# EAGLE board base_panelized (EAGLE 9.5.1), part 1 of 4
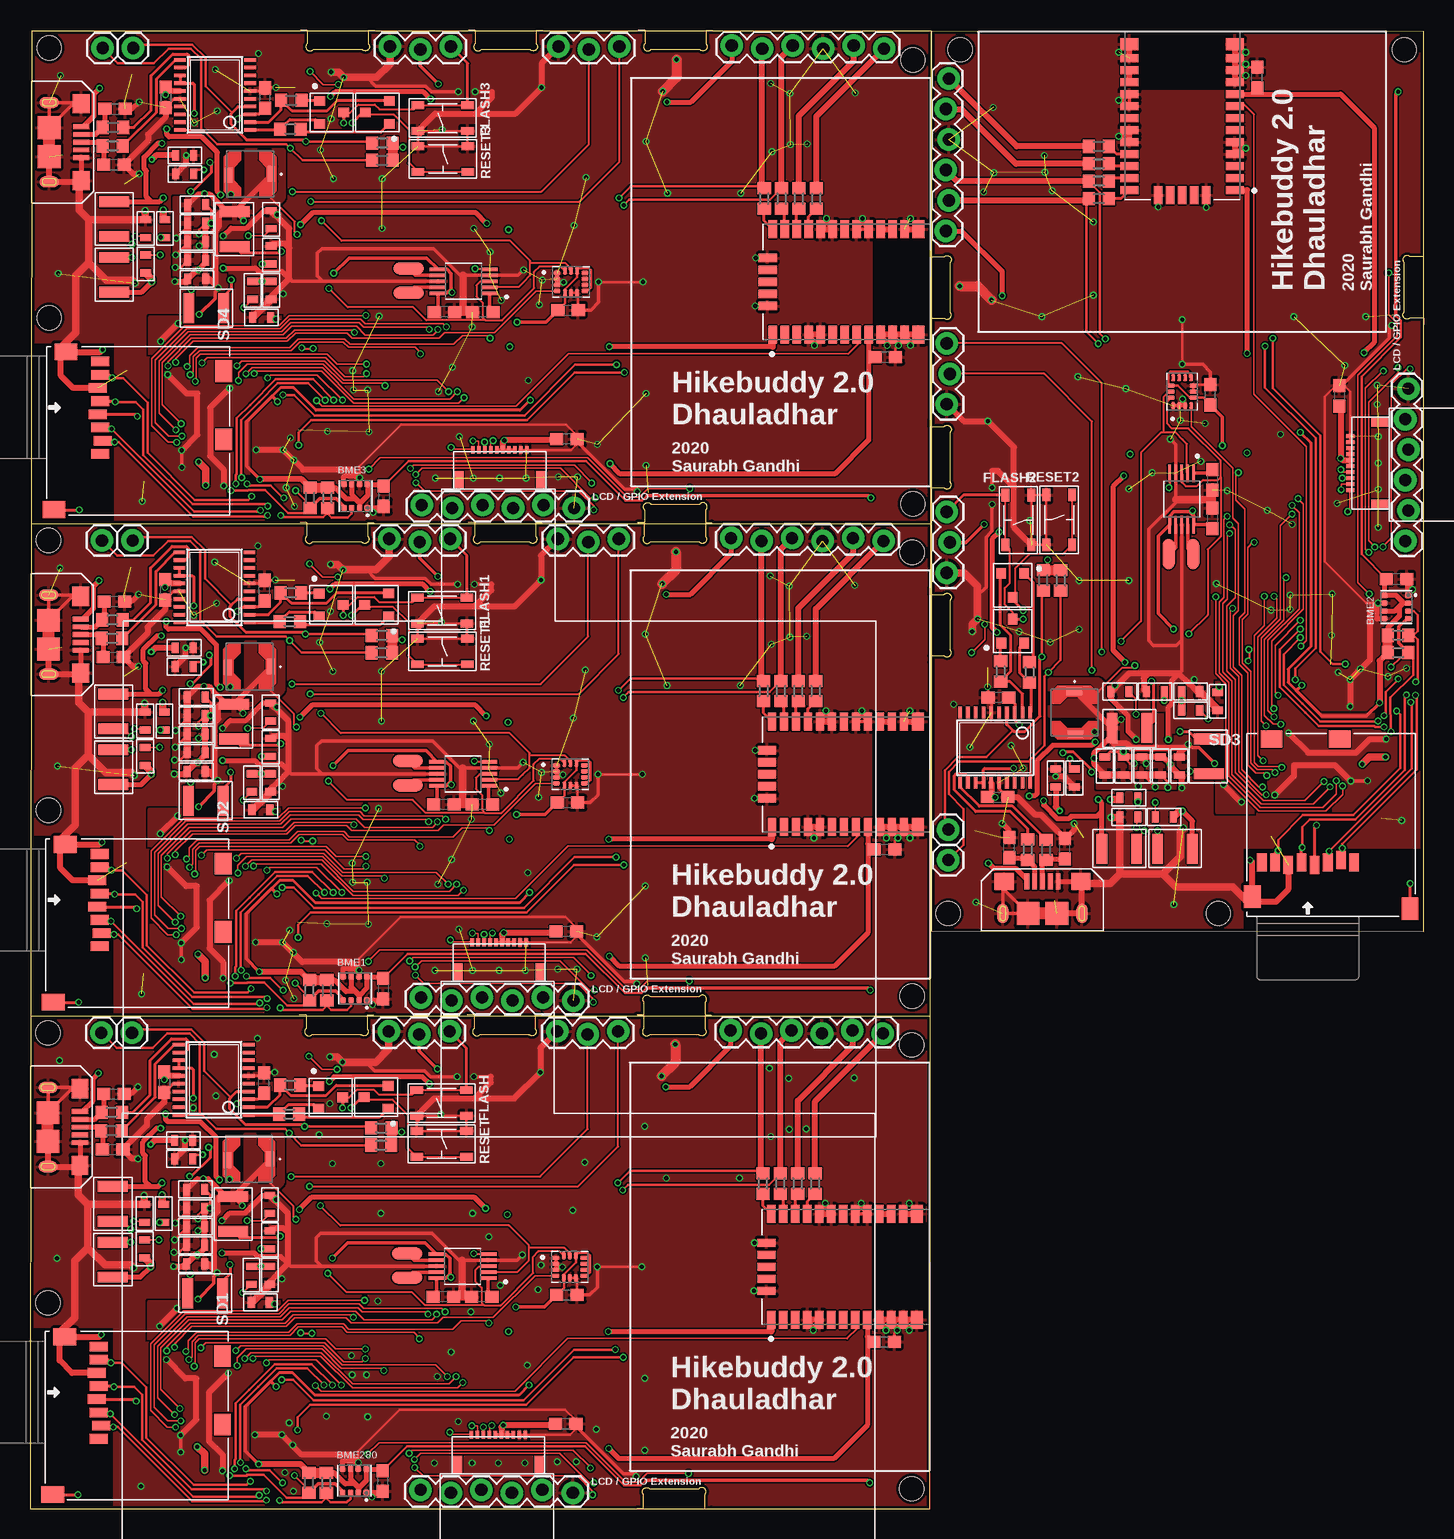
[diagram p0: board, top side]
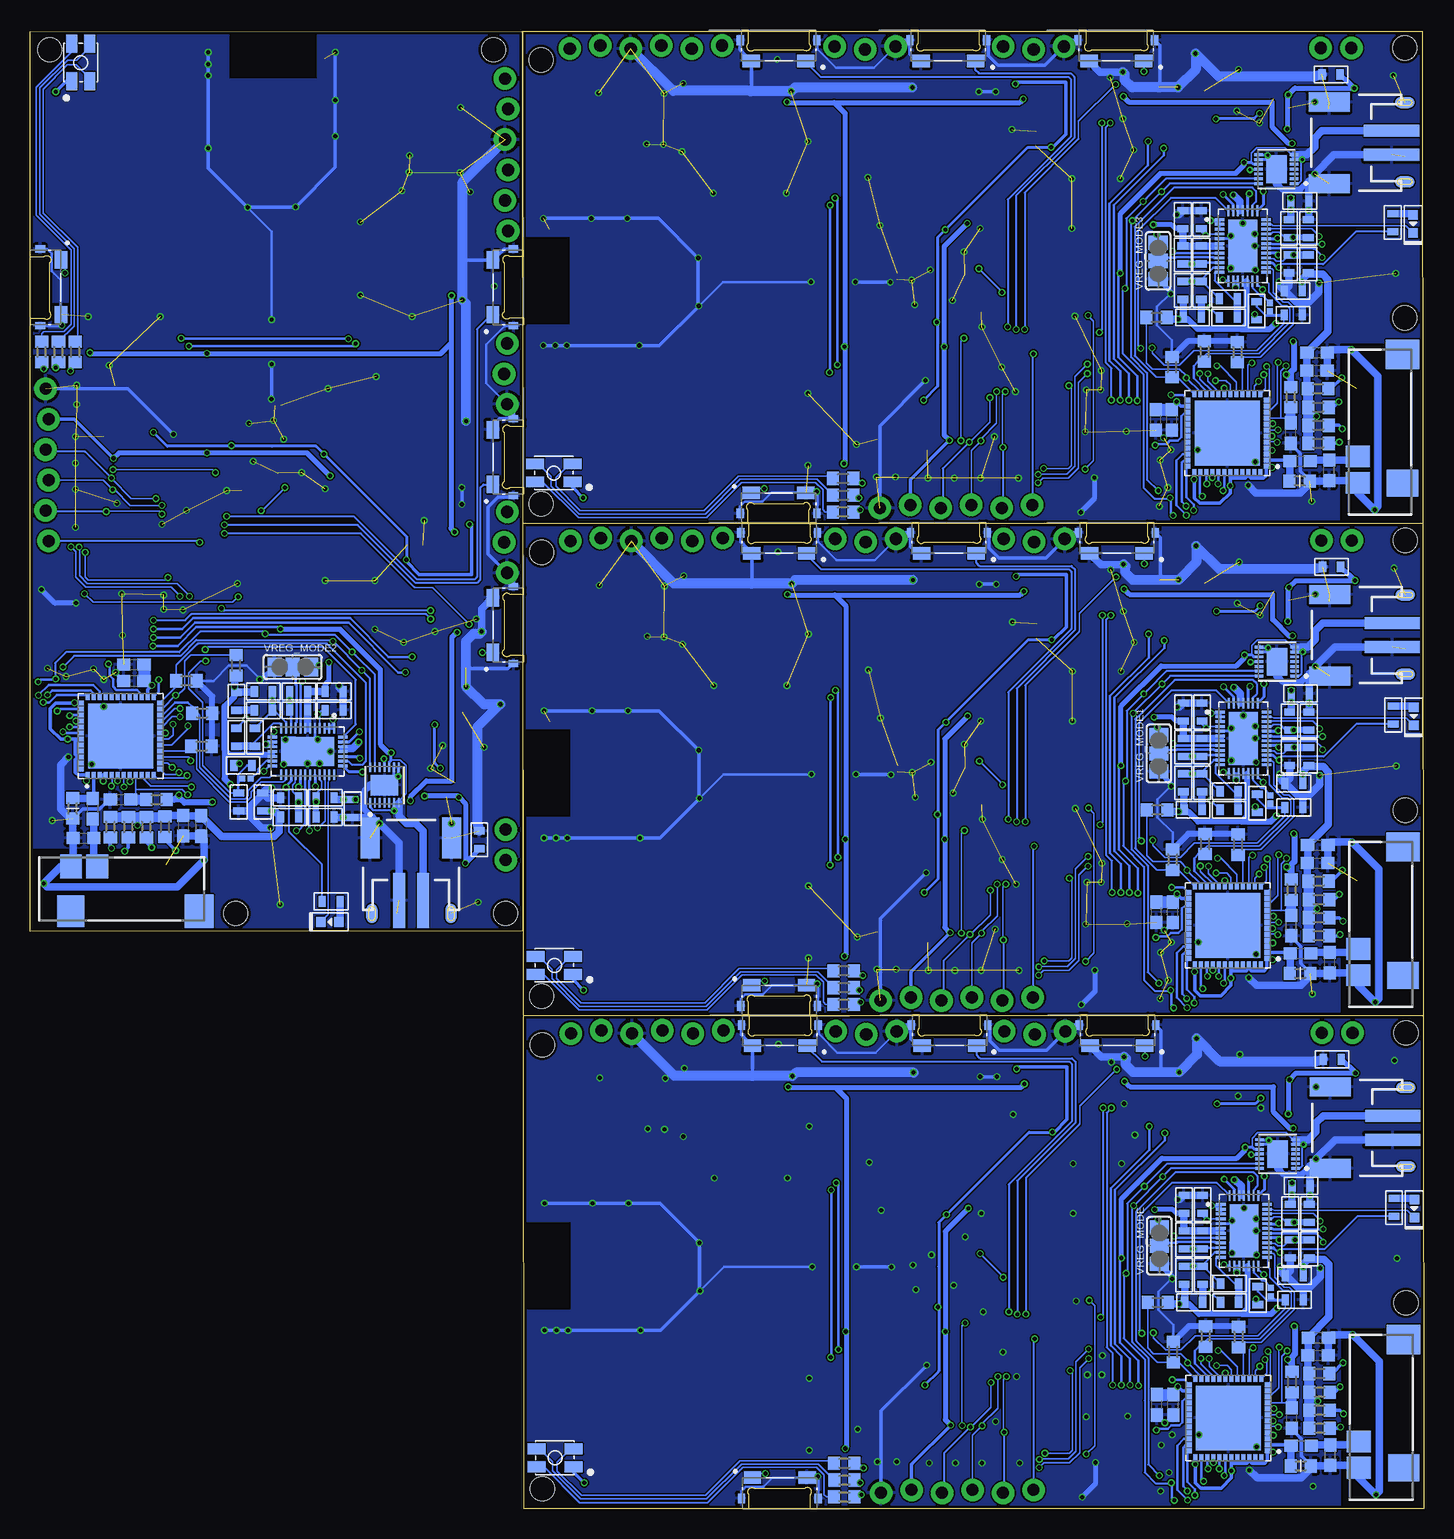
[diagram p1: board, bottom side, seen from below]

Size 116.2 x 123.25 mm. Coordinates in mm from the lower left corner, seen from the top.
Outline: 75.05,41.05 75,0 0,0 0.05,41.05
Outline: 0.05,41.05 75.05,41.05
Outline: 75.05,41.05 75.1,82.1
Outline: 0.1,82.1 0.05,41.05
Outline: 75.15,123.15 116.2,123.1 116.2,48.1 75.15,48.15 75.15,123.15
Outline: 0.1,82.1 75.1,82.1
Outline: 75.1,82.1 75.15,123.15
Outline: 75.15,123.15 0.15,123.15 0.1,82.1
Copper layers (1*16): Top 0.035mm / dielectric 1.5mm / Bottom 0.035mm
Design rules "MF_4_mil_drill_2_Layer": minimum track width 5mil, minimum drill 4mil, track to track 5mil, track to pad 5mil, pad to pad 5mil, via to via 5mil, smd to smd 0mil, copper to edge 10mil, drill to drill 10mil, minimum pad ring 4mil, minimum via ring 4mil, stop-mask expansion 2mil, vias tented up to drill 25mil, thermal gap 10mil
Holes 2 mm at 73.5,38.65 73.5,1.65 1.5,39.65 1.5,17.15 73.55,79.7 73.55,42.7 1.55,80.7 1.55,58.2 77.55,121.6 114.55,121.6 76.55,49.6 99.05,49.6 73.6,120.75 73.6,83.75 1.6,121.75 1.6,99.25
tKeepout: area 71,18.1 to 75,22.1; area 71,59.2 to 75,63.2; area 94,119.1 to 98,123.1; area 71.1,100.2 to 75.1,104.2
bKeepout: area 71,18.1 to 75,22.1; area 71,59.2 to 75,63.2; area 94,119.1 to 98,123.1; area 71.1,100.2 to 75.1,104.2

## Footprints (pad centres in the part's own frame; a part is rotated, then mirrored left to right if it is on the bottom)
PRO-OB-440_1 = smd 2 x 1.8: 1 1.865,-2.65; 2 1.865,-4.85 | smd 2.6 x 2.25: 3 -1.865,-2.65 | smd 2.8 x 2.45: 4 -1.865,-13.35
JST-2-SMD = smd 1 x 4.6: 1 -1,-3.7; 2 1,-3.7 | smd 1.6 x 3.4: NC1 -3.4,1.5; NC2 3.4,1.5
PSON65P250X250X100-8N = smd 0.49 x 0.45: 1 0.97,0.975; 2 0.97,0.325; 3 0.97,-0.325; 4 0.97,-0.975; 5 -0.97,-0.975; 6 -0.97,-0.325; 7 -0.97,0.325; 8 -0.97,0.975
C0603 = smd 1.1 x 1: 1 -0.85,0; 2 0.85,0
C0603' = smd 0.6 x 0.9: P$1 -0.75,0; P$2 0.75,0
LED0603 = smd 0.8 x 0.8: ANODE 0.75,0; CATHODE -0.75,0
PLCC4 = smd 1.5 x 0.9: P$1 -1.55,0.75; P$2 -1.55,-0.75; P$3 1.55,-0.75; P$4 1.55,0.75
PQFN50P700X700X104-49N = smd 0.45 x 0.35: 1 -3.265,2.75; 2 -3.265,2.25; 3 -3.265,1.75; 4 -3.265,1.25; 5 -3.265,0.75; 6 -3.265,0.25; 7 -3.265,-0.25; 8 -3.265,-0.75; 9 -3.265,-1.25; 10 -3.265,-1.75; 11 -3.265,-2.25; 12 -3.265,-2.75; 25 3.265,-2.75; 26 3.265,-2.25; 27 3.265,-1.75; 28 3.265,-1.25; 29 3.265,-0.75; 30 3.265,-0.25; 31 3.265,0.25; 32 3.265,0.75; 33 3.265,1.25; 34 3.265,1.75; 35 3.265,2.25; 36 3.265,2.75 | smd 0.35 x 0.45: 13 -2.75,-3.265; 14 -2.25,-3.265; 15 -1.75,-3.265; 16 -1.25,-3.265; 17 -0.75,-3.265; 18 -0.25,-3.265; 19 0.25,-3.265; 20 0.75,-3.265; 21 1.25,-3.265; 22 1.75,-3.265; 23 2.25,-3.265; 24 2.75,-3.265; 37 2.75,3.265; 38 2.25,3.265; 39 1.75,3.265; 40 1.25,3.265; 41 0.75,3.265; 42 0.25,3.265; 43 -0.25,3.265; 44 -0.75,3.265; 45 -1.25,3.265; 46 -1.75,3.265; 47 -2.25,3.265; 48 -2.75,3.265 | smd 5.4 x 5.4: 49 0,0
TACT4.2MM = smd 1.05 x 0.65: P$1 -2.075,1.075; P$2 2.075,1.075; P$3 -2.075,-1.075; P$4 2.075,-1.075
TSSOP20 = smd 0.305 x 0.991: 1 -2.925,-2.918; 2 -2.275,-2.918; 3 -1.625,-2.918; 4 -0.975,-2.918; 5 -0.325,-2.918; 6 0.325,-2.918; 7 0.975,-2.918; 8 1.625,-2.918; 9 2.275,-2.918; 10 2.925,-2.918; 11 2.925,2.918; 12 2.275,2.918; 13 1.625,2.918; 14 0.975,2.918; 15 0.325,2.918; 16 -0.325,2.918; 17 -0.975,2.918; 18 -1.625,2.918; 19 -2.275,2.918; 20 -2.925,2.918
MICROUSB-RIGHT = smd 0.4 x 1.35: 1 -1.3,1.27; 2 -0.65,1.27; 3 0,1.27; 4 0.65,1.27; 5 1.3,1.27 | smd 0.9 x 1.6: S1 -3.3,-1.4; S2 3.3,-1.4 | smd 1.6 x 1.4: S3 -3.2,1.27; S4 3.2,1.27 | smd 1.9 x 1.9: S5 -1.2,-1.405; S6 1.2,-1.405 | smd 0.9 x 1.6 bottom: S7 -3.3,-1.4; S8 3.3,-1.4
1X06_LOCK = drill 1.016 pad 1.88: 1 0,0; 2 2.54,-0.254; 3 5.08,0; 4 7.62,-0.254; 5 10.16,0; 6 12.7,-0.254
1X03_LOCK = drill 1.016 pad 1.88: 1 0,0.127; 2 2.54,-0.127; 3 5.08,0.127
SOLDER_PAD_2 = smd 1.016 x 2.54: P$1 -1.016,0; P$2 1.016,0
1X01 = drill 1.016 pad 1.88: 1 0,0
L0603 = smd 1 x 1.1: 1 -0.85,0; 2 0.85,0
INDP_LPS4018-472MRB = smd 0.635 x 1.27: 1 -1.77,0; 2 1.81,0.1
L1210 = smd 0.9 x 2.5: P$1 -1.45,0; P$2 1.45,0
R0603 = smd 1 x 1.1: 1 -0.85,0; 2 0.85,0
R0603' = smd 0.6 x 0.9: P$1 -0.75,0; P$2 0.75,0
SW_EVQ-P4HB3B = smd 1.45 x 1.05: 1 -2.275,0.875; 2 2.275,0.875 | smd 0.6 x 0.8: 3 -3.2,-0.85; 4 3.2,-0.85
MF-MICROSD = smd 1.4 x 1.9: G0 -6.589,7.001; G1 6.561,6.001 | smd 0.8 x 1.5: PIN1 -1.939,3.151; PIN2 -0.839,2.951; PIN3 0.261,3.151; PIN4 1.361,3.351; PIN5 2.461,3.151; PIN6 3.561,3.351; PIN7 4.661,3.151; PIN8 5.761,3.151 | smd 1.8 x 1.4: PIN9 4.961,-7.149; PIN10 -0.739,-7.149
PAD.02X.02 = smd 0.508 x 0.508: P$1 0,0
QFN40P600X400X80-39N = smd 0.86 x 0.22: 1 -1.935,2.2; 2 -1.935,1.8; 3 -1.935,1.4; 4 -1.935,1; 5 -1.935,0.6; 6 -1.935,0.2; 7 -1.935,-0.2; 8 -1.935,-0.6; 9 -1.935,-1; 10 -1.935,-1.4; 11 -1.935,-1.8; 12 -1.935,-2.2; 20 1.935,-2.2; 21 1.935,-1.8; 22 1.935,-1.4; 23 1.935,-1; 24 1.935,-0.6; 25 1.935,-0.2; 26 1.935,0.2; 27 1.935,0.6; 28 1.935,1; 29 1.935,1.4; 30 1.935,1.8; 31 1.935,2.2 | smd 0.22 x 0.86: 13 -1.2,-2.935; 14 -0.8,-2.935; 15 -0.4,-2.935; 16 0,-2.935; 17 0.4,-2.935; 18 0.8,-2.935; 19 1.2,-2.935; 32 1.2,2.935; 33 0.8,2.935; 34 0.4,2.935; 35 0,2.935; 36 -0.4,2.935; 37 -0.8,2.935; 38 -1.2,2.935 | smd 2.4 x 4.4: 39 0,0
SON40P300X300X80-15N = smd 0.76 x 0.22: 1 -1.485,1.2; 2 -1.485,0.8; 3 -1.485,0.4; 4 -1.485,0; 5 -1.485,-0.4; 6 -1.485,-0.8; 7 -1.485,-1.2; 8 1.485,-1.2; 9 1.485,-0.8; 10 1.485,-0.4; 11 1.485,0; 12 1.485,0.4; 13 1.485,0.8; 14 1.485,1.2 | smd 1.7 x 2.3: 15 0,0
SOT-23-3 = smd 0.9 x 0.8: P$1 -1,0.95; P$2 -1,-0.95; P$3 1,0
SOP50P490X110-10N = smd 1.44 x 0.3: 1 -2.145,1; 2 -2.145,0.5; 3 -2.145,0; 4 -2.145,-0.5; 5 -2.145,-1; 6 2.145,-1; 7 2.145,-0.5; 8 2.145,0; 9 2.145,0.5; 10 2.145,1
PQFN50P250X300X100-14N = smd 0.58 x 0.35: 1 -1.16,0.75; 2 -1.16,0.25; 3 -1.16,-0.25; 4 -1.16,-0.75; 8 1.16,-0.75; 9 1.16,-0.25; 10 1.16,0.25; 11 1.16,0.75 | smd 0.35 x 0.58: 5 -0.5,-0.91; 6 0,-0.91; 7 0.5,-0.91; 12 0.5,0.91; 13 0,0.91; 14 -0.5,0.91
FH12-10S-0.5SH = smd 0.3 x 0.655: DISP -0.25,5.25; EXTCOMIN -0.75,5.25; EXTMODE 1.25,5.25; SCLK -2.25,5.25; SCS -1.25,5.25; SI -1.75,5.25; VDD 0.75,5.25; VDDA 0.25,5.25; VSS 1.75,5.25; VSSA 2.25,5.25 | smd 0.85 x 1.5: P$1 -3.45,2.75; P$2 3.45,2.75
LCC100P960X1400X210-31N = smd 1.5 x 0.7: 1 4.4,-6.2; 2 4.4,-5.2; 3 4.4,-4.2; 4 4.4,-3.2; 5 4.4,-2.2; 6 4.4,-1.2; 7 4.4,-0.2; 8 4.4,0.8; 9 4.4,1.8; 10 4.4,2.8; 11 4.4,3.8; 12 4.4,4.8; 15 -4.4,4.8; 16 -4.4,3.8; 17 -4.4,2.8; 18 -4.4,1.8; 19 -4.4,0.8; 20 -4.4,-0.2; 21 -4.4,-1.2; 22 -4.4,-2.2; 23 -4.4,-3.2; 24 -4.4,-4.2; 25 -4.4,-5.2; 26 -4.4,-6.2 | smd 1.5 x 1: 13 4.4,5.95; 14 -4.4,5.95 | smd 0.7 x 1.5: 27 -2,-6.6; 28 -1,-6.6; 29 0,-6.6; 30 1,-6.6; 31 2,-6.6
SJ_2 = smd 1.168 x 1.6: 1 -1.524,0; 2 0,0; 3 1.524,0

## Placement (x,y rotation side)
ANT  PRO-OB-440  [PRO-OB-440_1]  3.55,0.75 180 bottom
ANT1  PRO-OB-440  [PRO-OB-440_1]  3.6,41.8 180 bottom
ANT2  PRO-OB-440  [PRO-OB-440_1]  115.45,51.65 90 bottom
ANT3  PRO-OB-440  [PRO-OB-440_1]  3.65,82.85 180 bottom
BATTERY1  S2B-PH-SM4-TB(LF)(SN)  [JST-2-SMD]  6.3,31.75 90 bottom
BATTERY2  S2B-PH-SM4-TB(LF)(SN)  [JST-2-SMD]  6.35,72.8 90 bottom
BATTERY3  S2B-PH-SM4-TB(LF)(SN)  [JST-2-SMD]  84.45,54.4 0 bottom
BATTERY4  S2B-PH-SM4-TB(LF)(SN)  [JST-2-SMD]  6.4,113.85 90 bottom
BME1  BME280  [PSON65P250X250X100-8N]  27.09,43.35 270 top
BME2  BME280  [PSON65P250X250X100-8N]  113.9,75.14 0 top
BME3  BME280  [PSON65P250X250X100-8N]  27.14,84.4 270 top
BME280  BME280  [PSON65P250X250X100-8N]  27.05,2.3 270 top
C1  4.7pF  [C0603]  10.23,5.21 0 bottom
C2  4.7pF  [C0603]  7.8,4.45 90 bottom
C3  0.1uF  [C0603]  11,7.55 90 bottom
C4  0.1uF  [C0603]  19.5,35.47 90 top
C5  47pF  [C0603]  7,34.57 0 top
C6  47pF  [C0603]  6.89,29.93 0 top
C7  10uF  [C0603]  11.21,35.53 270 top
C8  10uF  [C0603]  22.25,8.65 90 bottom
C9  10uF  [C0603']  7.65,37.45 180 bottom
C10  0.1uF  [C0603']  20,25.35 270 top
C11  22uF  [C0603']  18.45,22.4 90 bottom
C12  22uF  [C0603']  13.8,26.6 180 top
C13  10pF  [C0603']  11.15,24.6 270 bottom
C14  0.1uF  [C0603]  8.8,14.25 0 bottom
C15  0.1uF  [C0603]  8.82,12.76 0 bottom
C16  10uF  [C0603']  10.25,26.9 180 bottom
C17  4.7uF  [C0603]  71.2,13.9 0 top
C18  10pF  [C0603']  9.55,21.65 90 bottom
C19  4.7uF  [C0603]  44.65,7.05 180 top
C20  0.1uF  [C0603']  10.8,17.4 180 bottom
C21  10uF  [C0603]  44.75,17.8 0 top
C22  4.7pF  [C0603]  10.28,46.26 0 bottom
C23  10uF  [C0603]  29.39,2.29 270 top
C24  10uF  [C0603']  10.8,19.4 180 bottom
C25  1uF  [C0603']  13.8,25.05 180 top
C26  1uF  [C0603']  13.8,23.5 180 top
C27  10uF  [C0603']  13.8,21.95 180 top
C28  10uF  [C0603']  13.8,20.4 0 top
C29  22uF  [C0603']  20,25.35 270 bottom
C30  22uF  [C0603']  19.2,17.2 180 top
C31  33pF  [C0603']  18.45,19.45 270 bottom
C32  330pF  [C0603']  18.45,19.45 270 top
C33  10pF  [C0603']  16.2,18.75 0 bottom
C34  0.47uF  [C0603']  12.8,29.15 0 top
C35  0.1uF  [C0603']  12.8,30.7 180 top
C36  4.7uF  [C0603]  37.65,17.65 180 top
C37  4.7uF  [C0603]  34.45,17.65 180 top
C38  10uF  [C0603]  20.9,8.65 90 bottom
C39  4.7pF  [C0603]  7.85,45.5 90 bottom
C40  0.1uF  [C0603]  11.05,48.6 90 bottom
C41  0.1uF  [C0603]  19.55,76.52 90 top
C42  47pF  [C0603]  7.04,75.62 0 top
C43  47pF  [C0603]  6.95,70.98 0 top
C44  10uF  [C0603]  11.26,76.58 270 top
C45  0.1uF  [C0603]  8.85,55.3 0 bottom
C46  0.1uF  [C0603]  8.87,53.81 0 bottom
C47  10uF  [C0603]  29.44,43.34 270 top
C48  10uF  [C0603']  7.7,78.5 180 bottom
C49  0.1uF  [C0603']  20.05,66.4 270 top
C50  22uF  [C0603']  18.5,63.45 90 bottom
C51  22uF  [C0603']  13.85,67.65 180 top
C52  10pF  [C0603']  11.2,65.65 270 bottom
C53  10uF  [C0603']  10.3,67.95 180 bottom
C54  10pF  [C0603']  9.6,62.7 90 bottom
C55  10uF  [C0603']  10.85,60.45 180 bottom
C56  1uF  [C0603']  13.85,66.1 180 top
C57  1uF  [C0603']  13.85,64.55 180 top
C58  10uF  [C0603']  13.85,63 180 top
C59  10uF  [C0603']  13.85,61.45 0 top
C60  22uF  [C0603']  20.05,66.4 270 bottom
C61  22uF  [C0603']  19.25,58.25 180 top
C62  33pF  [C0603']  18.5,60.5 270 bottom
C63  330pF  [C0603']  18.5,60.5 270 top
C64  10pF  [C0603']  16.25,59.8 0 bottom
C65  0.47uF  [C0603']  12.85,70.2 0 top
C66  0.1uF  [C0603']  12.85,71.75 180 top
C67  4.7uF  [C0603]  37.7,58.7 180 top
C68  4.7uF  [C0603]  34.5,58.7 180 top
C69  4.7uF  [C0603]  71.25,54.95 0 top
C70  4.7uF  [C0603]  44.7,48.1 180 top
C71  10uF  [C0603]  22.3,49.7 90 bottom
C72  10uF  [C0603]  20.95,49.7 90 bottom
C73  0.1uF  [C0603']  10.85,58.45 180 bottom
C74  10uF  [C0603]  44.8,58.85 0 top
C75  4.7pF  [C0603]  110.99,58.33 270 bottom
C76  4.7pF  [C0603]  111.75,55.9 0 bottom
C77  0.1uF  [C0603]  108.65,59.1 0 bottom
C78  0.1uF  [C0603]  80.73,67.61 180 top
C79  47pF  [C0603]  81.63,55.09 90 top
C80  47pF  [C0603]  86.27,54.99 90 top
C81  10uF  [C0603]  80.67,59.3 0 top
C82  0.1uF  [C0603]  101.95,56.9 270 bottom
C83  0.1uF  [C0603]  103.44,56.92 270 bottom
C84  10uF  [C0603]  113.91,77.49 0 top
C85  10uF  [C0603']  78.75,55.75 90 bottom
C86  0.1uF  [C0603']  90.85,68.1 0 top
C87  22uF  [C0603']  93.8,66.55 0 bottom
C88  22uF  [C0603']  89.6,61.9 270 top
C89  10pF  [C0603']  91.6,59.25 180 bottom
C90  10uF  [C0603']  89.3,58.35 90 bottom
C91  10pF  [C0603']  94.55,57.65 0 bottom
C92  10uF  [C0603']  96.8,58.9 90 bottom
C93  1uF  [C0603']  91.15,61.9 270 top
C94  1uF  [C0603']  92.7,61.9 270 top
C95  10uF  [C0603']  94.25,61.9 270 top
C96  10uF  [C0603']  95.8,61.9 90 top
C97  22uF  [C0603']  90.85,68.1 180 bottom
C98  22uF  [C0603']  99,67.3 270 top
C99  33pF  [C0603']  96.75,66.55 180 bottom
C100  330pF  [C0603']  96.75,66.55 0 top
C101  10pF  [C0603']  97.45,64.3 270 bottom
C102  0.47uF  [C0603']  87.05,60.9 90 top
C103  0.1uF  [C0603']  85.5,60.9 270 top
C104  4.7uF  [C0603]  98.55,85.75 270 top
C105  4.7uF  [C0603]  98.55,82.55 270 top
C106  4.7uF  [C0603]  102.3,119.3 90 top
C107  4.7uF  [C0603]  109.15,92.75 270 top
C108  10uF  [C0603]  107.55,70.35 0 bottom
C109  10uF  [C0603]  107.55,69 0 bottom
C110  0.1uF  [C0603']  98.8,58.9 90 bottom
C111  10uF  [C0603]  98.4,92.85 90 top
C112  4.7pF  [C0603]  10.33,87.31 0 bottom
C113  4.7pF  [C0603]  7.9,86.55 90 bottom
C114  0.1uF  [C0603]  11.1,89.65 90 bottom
C115  0.1uF  [C0603]  19.61,117.57 90 top
C116  47pF  [C0603]  7.09,116.67 0 top
C117  47pF  [C0603]  7,112.03 0 top
C118  10uF  [C0603]  11.3,117.63 270 top
C119  0.1uF  [C0603]  8.9,96.35 0 bottom
C120  0.1uF  [C0603]  8.92,94.86 0 bottom
C121  10uF  [C0603]  29.49,84.39 270 top
C122  10uF  [C0603']  7.75,119.55 180 bottom
C123  0.1uF  [C0603']  20.1,107.45 270 top
C124  22uF  [C0603']  18.55,104.5 90 bottom
C125  22uF  [C0603']  13.9,108.7 180 top
C126  10pF  [C0603']  11.25,106.7 270 bottom
C127  10uF  [C0603']  10.35,109 180 bottom
C128  10pF  [C0603']  9.65,103.75 90 bottom
C129  10uF  [C0603']  10.9,101.5 180 bottom
C130  1uF  [C0603']  13.9,107.15 180 top
C131  1uF  [C0603']  13.9,105.6 180 top
C132  10uF  [C0603']  13.9,104.05 180 top
C133  10uF  [C0603']  13.9,102.5 0 top
C134  22uF  [C0603']  20.1,107.45 270 bottom
C135  22uF  [C0603']  19.3,99.3 180 top
C136  33pF  [C0603']  18.55,101.55 270 bottom
C137  330pF  [C0603']  18.55,101.55 270 top
C138  10pF  [C0603']  16.3,100.85 0 bottom
C139  0.47uF  [C0603']  12.9,111.25 0 top
C140  0.1uF  [C0603']  12.9,112.8 180 top
C141  4.7uF  [C0603]  37.75,99.75 180 top
C142  4.7uF  [C0603]  34.55,99.75 180 top
C143  4.7uF  [C0603]  71.3,96 0 top
C144  4.7uF  [C0603]  44.75,89.15 180 top
C145  10uF  [C0603]  22.35,90.75 90 bottom
C146  10uF  [C0603]  21,90.75 90 bottom
C147  0.1uF  [C0603']  10.9,99.5 180 bottom
C148  10uF  [C0603]  44.85,99.9 0 top
D1  MF-LED-0603-RED  [LED0603]  0.8,25 90 bottom
D2  MF-LED-3228-RGB  [PLCC4]  72.48,45.28 180 bottom
D3  MF-LED-0603-RED  [LED0603]  0.85,66.05 90 bottom
D4  MF-LED-3228-RGB  [PLCC4]  72.44,4.23 180 bottom
D5  MF-LED-3228-RGB  [PLCC4]  111.97,120.53 90 bottom
D6  MF-LED-0603-RED  [LED0603]  91.2,48.9 0 bottom
D7  MF-LED-3228-RGB  [PLCC4]  72.53,86.33 180 bottom
D8  MF-LED-0603-RED  [LED0603]  0.9,107.1 90 bottom
ESP32-PICO-D1  ESP32-PICO-D4  [PQFN50P700X700X104-49N]  16.35,48.6 180 bottom
ESP32-PICO-D2  ESP32-PICO-D4  [PQFN50P700X700X104-49N]  108.65,64.4 90 bottom
ESP32-PICO-D3  ESP32-PICO-D4  [PQFN50P700X700X104-49N]  16.4,89.65 180 bottom
ESP32-PICO-D4  ESP32-PICO-D4  [PQFN50P700X700X104-49N]  16.3,7.55 180 bottom
FLASH  MF-SW-TACT-4.2MM  [TACT4.2MM]  34.31,33.8 0 top
FLASH1  MF-SW-TACT-4.2MM  [TACT4.2MM]  34.36,74.86 0 top
FLASH2  MF-SW-TACT-4.2MM  [TACT4.2MM]  82.39,82.41 90 top
FLASH3  MF-SW-TACT-4.2MM  [TACT4.2MM]  34.41,115.91 0 top
FT1  FT231XS  [TSSOP20]  15.37,76.79 90 top
FT2  FT231XS  [TSSOP20]  80.46,63.42 180 top
FT3  FT231XS  [TSSOP20]  15.42,117.84 90 top
FT231  FT231XS  [TSSOP20]  15.32,35.74 90 top
J1  MF-CON-MICROUSB-RIGHT  [MICROUSB-RIGHT]  2.9,31.8 270 top
J2  GPS Port  [1X06_LOCK]  71.1,39.6 180 top
J3  [1X03_LOCK]  43.95,39.65 0 top
J4  [1X03_LOCK]  29.9,39.65 0 top
J5  SOLDER_PAD_2  [SOLDER_PAD_2]  31.45,20.25 270 top
J6  [1X01]  5.95,39.65 0 top
J7  [1X01]  8.5,39.65 0 top
J8  [1X06_LOCK]  45.25,1.3 180 top
J9  GPS Port  [1X06_LOCK]  71.15,80.65 180 top
J10  MF-CON-MICROUSB-RIGHT  [MICROUSB-RIGHT]  2.95,72.85 270 top
J11  [1X03_LOCK]  44,80.7 0 top
J12  [1X03_LOCK]  29.95,80.7 0 top
J13  SOLDER_PAD_2  [SOLDER_PAD_2]  31.5,61.3 270 top
J14  [1X01]  6,80.7 0 top
J15  [1X01]  8.55,80.7 0 top
J16  [1X06_LOCK]  45.3,42.35 180 top
J17  GPS Port  [1X06_LOCK]  76.6,119.2 270 top
J18  MF-CON-MICROUSB-RIGHT  [MICROUSB-RIGHT]  84.4,51 0 top
J19  [1X03_LOCK]  76.55,92.05 90 top
J20  [1X03_LOCK]  76.55,78 90 top
J21  SOLDER_PAD_2  [SOLDER_PAD_2]  95.95,79.55 0 top
J22  [1X01]  76.55,54.05 90 top
J23  [1X01]  76.55,56.6 90 top
J24  [1X06_LOCK]  114.9,93.35 270 top
J25  GPS Port  [1X06_LOCK]  71.2,121.7 180 top
J26  MF-CON-MICROUSB-RIGHT  [MICROUSB-RIGHT]  3,113.9 270 top
J27  [1X03_LOCK]  44.05,121.75 0 top
J28  [1X03_LOCK]  30,121.75 0 top
J29  SOLDER_PAD_2  [SOLDER_PAD_2]  31.55,102.35 270 top
J30  [1X01]  6.05,121.75 0 top
J31  [1X01]  8.6,121.75 0 top
J32  [1X06_LOCK]  45.35,83.4 180 top
L1  30Ω/1.8A  [L0603]  10.26,3.55 0 bottom
L2  3.3uH  [INDP_LPS4018-472MRB]  18.25,29.15 180 top
L3  2.2uH  [L1210]  14.6,17.95 0 top
L4  4.7uH  [L1210]  6.9,25.4 270 top
L5  2.2uH  [L1210]  16.95,24.55 90 top
L6  4.7uH  [L1210]  6.9,20.75 270 top
L7  30Ω/1.8A  [L0603]  10.31,44.6 0 bottom
L8  3.3uH  [INDP_LPS4018-472MRB]  18.3,70.2 180 top
L9  2.2uH  [L1210]  14.65,59 0 top
L10  4.7uH  [L1210]  6.95,66.45 270 top
L11  2.2uH  [L1210]  17,65.6 90 top
L12  4.7uH  [L1210]  6.95,61.8 270 top
L13  30Ω/1.8A  [L0603]  112.65,58.36 270 bottom
L14  3.3uH  [INDP_LPS4018-472MRB]  87.05,66.35 270 top
L15  2.2uH  [L1210]  98.25,62.7 90 top
L16  4.7uH  [L1210]  90.8,55 0 top
L17  2.2uH  [L1210]  91.65,65.05 180 top
L18  4.7uH  [L1210]  95.45,55 0 top
L19  30Ω/1.8A  [L0603]  10.36,85.65 0 bottom
L20  3.3uH  [INDP_LPS4018-472MRB]  18.35,111.25 180 top
L21  2.2uH  [L1210]  14.7,100.05 0 top
L22  4.7uH  [L1210]  7,107.5 270 top
L23  2.2uH  [L1210]  17.05,106.65 90 top
L24  4.7uH  [L1210]  7,102.85 270 top
R1  10k  [R0603]  11,10.55 90 bottom
R2  10k  [R0603]  22.18,17.18 0 bottom
R3  27  [R0603]  6.83,33.03 0 top
R4  27  [R0603]  6.79,31.49 0 top
R5  10k  [R0603]  21.68,35.29 0 top
R6  10k  [R0603]  21.61,32.88 0 top
R7  2K  [R0603']  9.55,24.6 270 top
R8  3K  [R0603']  18.45,25.35 270 bottom
R9  560K  [R0603']  20,22.4 90 bottom
R10  1k  [R0603]  29.28,31.73 0 top
R11  1k  [R0603]  29.27,30.29 0 top
R12  10k  [R0603]  8.7,6.7 180 bottom
R13  10k  [R0603]  8.7,8.2 180 bottom
R14  10k  [R0603]  8.7,9.7 180 bottom
R15  100  [R0603]  62.55,27.1 270 top
R16  1K  [R0603']  13.85,17.75 90 bottom
R17  100  [R0603]  61.1,27.1 90 top
R18  100  [R0603]  65.45,27.1 90 top
R19  100  [R0603]  64,27.1 90 top
R20  100K  [R0603']  20,22.4 270 top
R21  1K  [R0603']  2.5,25.1 270 bottom
R22  220K  [R0603']  9.55,24.6 90 bottom
R23  680K  [R0603']  11.15,24.6 270 top
R24  220K  [R0603']  11.15,21.65 270 bottom
R25  680K  [R0603']  9.55,21.65 90 top
R26  680K  [R0603']  20,19.45 270 bottom
R27  220K  [R0603']  20,19.45 90 top
R28  121K  [R0603']  19.2,17.2 180 bottom
R29  15K  [R0603']  16.2,17.2 0 bottom
R30  10k  [R0603]  18.2,14.35 270 bottom
R31  10k  [R0603]  15.45,14.3 270 bottom
R32  10k  [R0603]  11.05,51.6 90 bottom
R33  10k  [R0603]  22.23,58.23 0 bottom
R34  27  [R0603]  6.88,74.08 0 top
R35  27  [R0603]  6.84,72.54 0 top
R36  10k  [R0603]  20.9,13.05 270 bottom
R37  2K  [R0603]  23.25,2.15 90 top
R38  2K  [R0603]  24.7,2.15 90 top
R39  10k  [R0603]  21.73,76.34 0 top
R40  1k  [R0603]  48.31,3.77 180 bottom
R41  1k  [R0603]  48.31,0.97 180 bottom
R42  1k  [R0603]  48.3,2.37 180 bottom
R43  10k  [R0603]  8.72,11.25 180 bottom
R44  10k  [R0603]  21.66,73.93 0 top
R45  1k  [R0603]  29.33,72.78 0 top
R46  1k  [R0603]  29.32,71.33 0 top
R47  10k  [R0603]  8.75,47.75 180 bottom
R48  10k  [R0603]  8.75,49.25 180 bottom
R49  10k  [R0603]  8.75,50.75 180 bottom
R50  1k  [R0603]  48.37,44.82 180 bottom
R51  1k  [R0603]  48.37,42.02 180 bottom
R52  1k  [R0603]  48.35,43.42 180 bottom
R53  10k  [R0603]  8.77,52.3 180 bottom
R54  2K  [R0603]  23.3,43.2 90 top
R55  2K  [R0603]  24.75,43.2 90 top
R56  100  [R0603]  62.6,68.15 270 top
R57  100  [R0603]  61.15,68.15 90 top
R58  100  [R0603]  65.5,68.15 90 top
R59  100  [R0603]  64.05,68.15 90 top
R60  2K  [R0603']  9.6,65.65 270 top
R61  3K  [R0603']  18.5,66.4 270 bottom
R62  560K  [R0603']  20.05,63.45 90 bottom
R63  100K  [R0603']  20.05,63.45 270 top
R64  1K  [R0603']  2.55,66.15 270 bottom
R65  220K  [R0603']  9.6,65.65 90 bottom
R66  680K  [R0603']  11.2,65.65 270 top
R67  220K  [R0603']  11.2,62.7 270 bottom
R68  680K  [R0603']  9.6,62.7 90 top
R69  680K  [R0603']  20.05,60.5 270 bottom
R70  220K  [R0603']  20.05,60.5 90 top
R71  121K  [R0603']  19.25,58.25 180 bottom
R72  15K  [R0603']  16.25,58.25 0 bottom
R73  10k  [R0603]  18.25,55.4 270 bottom
R74  10k  [R0603]  15.5,55.35 270 bottom
R75  10k  [R0603]  20.95,54.1 270 bottom
R76  1K  [R0603']  13.9,58.8 90 bottom
R77  10k  [R0603]  105.65,59.1 0 bottom
R78  10k  [R0603]  99.02,70.28 270 bottom
R79  27  [R0603]  83.17,54.92 90 top
R80  27  [R0603]  84.71,54.9 90 top
R81  10k  [R0603]  80.91,69.78 90 top
R82  10k  [R0603]  83.32,69.7 90 top
R83  1k  [R0603]  84.47,77.38 90 top
R84  1k  [R0603]  85.92,77.37 90 top
R85  10k  [R0603]  109.5,56.8 90 bottom
R86  10k  [R0603]  108,56.8 90 bottom
R87  10k  [R0603]  106.5,56.8 90 bottom
R88  1k  [R0603]  112.43,96.42 90 bottom
R89  1k  [R0603]  115.23,96.42 90 bottom
R90  1k  [R0603]  113.83,96.41 90 bottom
R91  10k  [R0603]  104.95,56.82 90 bottom
R92  2K  [R0603]  114.05,71.35 180 top
R93  2K  [R0603]  114.05,72.8 180 top
R94  100  [R0603]  89.1,110.65 0 top
R95  100  [R0603]  89.1,109.2 180 top
R96  100  [R0603]  89.1,113.55 180 top
R97  100  [R0603]  89.1,112.1 180 top
R98  2K  [R0603']  91.6,57.65 0 top
R99  3K  [R0603']  90.85,66.55 180 bottom
R100  560K  [R0603']  93.8,68.1 0 bottom
R101  100K  [R0603']  93.8,68.1 0 top
R102  1K  [R0603']  91.1,50.6 180 bottom
R103  220K  [R0603']  91.6,57.65 0 bottom
R104  680K  [R0603']  91.6,59.25 0 top
R105  220K  [R0603']  94.55,59.25 180 bottom
R106  680K  [R0603']  94.55,57.65 180 top
R107  680K  [R0603']  96.75,68.1 180 bottom
R108  220K  [R0603']  96.75,68.1 180 top
R109  121K  [R0603']  99,67.3 90 bottom
R110  15K  [R0603']  99,64.3 270 bottom
R111  10k  [R0603]  101.85,66.3 180 bottom
R112  10k  [R0603]  101.9,63.55 180 bottom
R113  10k  [R0603]  103.15,69 180 bottom
R114  1K  [R0603']  98.45,61.95 0 bottom
R115  10k  [R0603]  11.1,92.65 90 bottom
R116  10k  [R0603]  22.28,99.28 0 bottom
R117  27  [R0603]  6.92,115.13 0 top
R118  27  [R0603]  6.89,113.59 0 top
R119  10k  [R0603]  21.79,117.39 0 top
R120  10k  [R0603]  21.7,114.98 0 top
R121  1k  [R0603]  29.38,113.83 0 top
R122  1k  [R0603]  29.37,112.39 0 top
R123  10k  [R0603]  8.8,88.8 180 bottom
R124  10k  [R0603]  8.8,90.3 180 bottom
R125  10k  [R0603]  8.8,91.8 180 bottom
R126  1k  [R0603]  48.41,85.87 180 bottom
R127  1k  [R0603]  48.41,83.07 180 bottom
R128  1k  [R0603]  48.41,84.47 180 bottom
R129  10k  [R0603]  8.82,93.35 180 bottom
R130  2K  [R0603]  23.35,84.25 90 top
R131  2K  [R0603]  24.8,84.25 90 top
R132  100  [R0603]  62.65,109.2 270 top
R133  100  [R0603]  61.2,109.2 90 top
R134  100  [R0603]  65.55,109.2 90 top
R135  100  [R0603]  64.1,109.2 90 top
R136  2K  [R0603']  9.65,106.7 270 top
R137  3K  [R0603']  18.55,107.45 270 bottom
R138  560K  [R0603']  20.1,104.5 90 bottom
R139  100K  [R0603']  20.1,104.5 270 top
R140  1K  [R0603']  2.6,107.2 270 bottom
R141  220K  [R0603']  9.65,106.7 90 bottom
R142  680K  [R0603']  11.25,106.7 270 top
R143  220K  [R0603']  11.25,103.75 270 bottom
R144  680K  [R0603']  9.65,103.75 90 top
R145  680K  [R0603']  20.1,101.55 270 bottom
R146  220K  [R0603']  20.1,101.55 90 top
R147  121K  [R0603']  19.3,99.3 180 bottom
R148  15K  [R0603']  16.3,99.3 0 bottom
R149  10k  [R0603]  18.3,96.45 270 bottom
R150  10k  [R0603]  15.55,96.4 270 bottom
R151  10k  [R0603]  21,95.15 270 bottom
R152  1K  [R0603']  13.95,99.85 90 bottom
RESET  MF-SW-TACT-4.2MM  [TACT4.2MM]  34.32,30.4 180 top
RESET1  MF-SW-TACT-4.2MM  [TACT4.2MM]  34.37,71.45 180 top
RESET2  MF-SW-TACT-4.2MM  [TACT4.2MM]  85.8,82.42 270 top
RESET3  MF-SW-TACT-4.2MM  [TACT4.2MM]  34.42,112.5 180 top
S1  EVQ-P4HB3B  [SW_EVQ-P4HB3B]  53.7,1.7 0 bottom
S2  EVQ-P4HB3B  [SW_EVQ-P4HB3B]  39.55,39.45 180 bottom
S3  EVQ-P4HB3B  [SW_EVQ-P4HB3B]  25.55,39.45 180 bottom
S4  EVQ-P4HB3B  [SW_EVQ-P4HB3B]  53.7,39.45 180 bottom
S5  EVQ-P4HB3B  [SW_EVQ-P4HB3B]  39.6,80.5 180 bottom
S6  EVQ-P4HB3B  [SW_EVQ-P4HB3B]  25.6,80.5 180 bottom
S7  EVQ-P4HB3B  [SW_EVQ-P4HB3B]  53.75,80.5 180 bottom
S8  EVQ-P4HB3B  [SW_EVQ-P4HB3B]  53.75,42.75 0 bottom
S9  EVQ-P4HB3B  [SW_EVQ-P4HB3B]  76.75,87.65 90 bottom
S10  EVQ-P4HB3B  [SW_EVQ-P4HB3B]  76.75,73.65 90 bottom
S11  EVQ-P4HB3B  [SW_EVQ-P4HB3B]  76.75,101.8 90 bottom
S12  EVQ-P4HB3B  [SW_EVQ-P4HB3B]  114.5,101.8 270 bottom
S13  EVQ-P4HB3B  [SW_EVQ-P4HB3B]  39.65,121.55 180 bottom
S14  EVQ-P4HB3B  [SW_EVQ-P4HB3B]  25.65,121.55 180 bottom
S15  EVQ-P4HB3B  [SW_EVQ-P4HB3B]  53.8,121.55 180 bottom
S16  EVQ-P4HB3B  [SW_EVQ-P4HB3B]  53.8,83.8 0 bottom
SD1  MF-MICROSD  [MF-MICROSD]  8.9,7.75 90 top
SD2  MF-MICROSD  [MF-MICROSD]  8.95,48.8 90 top
SD3  MF-MICROSD  [MF-MICROSD]  108.45,57 180 top
SD4  MF-MICROSD  [MF-MICROSD]  9,89.85 90 top
TP1  TEST-POINT2  [PAD.02X.02]  12.75,17.7 0 bottom
TP2  TEST-POINT2  [PAD.02X.02]  12.75,18.4 0 bottom
TP3  TEST-POINT2  [PAD.02X.02]  12.8,58.75 0 bottom
TP4  TEST-POINT2  [PAD.02X.02]  12.8,59.45 0 bottom
TP5  TEST-POINT2  [PAD.02X.02]  98.5,60.85 270 bottom
TP6  TEST-POINT2  [PAD.02X.02]  97.8,60.85 270 bottom
TP7  TEST-POINT2  [PAD.02X.02]  12.85,99.8 0 bottom
TP8  TEST-POINT2  [PAD.02X.02]  12.85,100.5 0 bottom
U1  LTC3586EUFE-1#PBF  [QFN40P600X400X80-39N]  15,23.15 0 bottom
U2  MAX17260SETD+  [SON40P300X300X80-15N]  12.2,29.55 180 bottom
U3  MF-DSC-SOT233-MMBT3904  [SOT-23-3]  25.05,34.27 0 top
U4  MF-DSC-SOT233-MMBT3904  [SOT-23-3]  28.86,34.28 180 top
U5  DRV2605LTDGSRQ1  [SOP50P490X110-10N]  36.05,20.2 180 top
U6  BMX160  [PQFN50P250X300X100-14N]  45,20.15 0 top
U7  MF-DSC-SOT233-MMBT3904  [SOT-23-3]  25.11,75.32 0 top
U8  MF-DSC-SOT233-MMBT3904  [SOT-23-3]  28.91,75.33 180 top
U9  LTC3586EUFE-1#PBF  [QFN40P600X400X80-39N]  15.05,64.2 0 bottom
U10  MAX17260SETD+  [SON40P300X300X80-15N]  12.25,70.6 180 bottom
U11  DRV2605LTDGSRQ1  [SOP50P490X110-10N]  36.1,61.25 180 top
U12  BMX160  [PQFN50P250X300X100-14N]  45.05,61.2 0 top
U13  MF-DSC-SOT233-MMBT3904  [SOT-23-3]  81.93,73.16 90 top
U14  MF-DSC-SOT233-MMBT3904  [SOT-23-3]  81.92,76.95 270 top
U15  LTC3586EUFE-1#PBF  [QFN40P600X400X80-39N]  93.05,63.1 270 bottom
U16  MAX17260SETD+  [SON40P300X300X80-15N]  86.65,60.3 90 bottom
U17  DRV2605LTDGSRQ1  [SOP50P490X110-10N]  96,84.15 270 top
U18  BMX160  [PQFN50P250X300X100-14N]  96.05,93.1 90 top
U19  MF-DSC-SOT233-MMBT3904  [SOT-23-3]  25.16,116.37 0 top
U20  MF-DSC-SOT233-MMBT3904  [SOT-23-3]  28.95,116.38 180 top
U21  LTC3586EUFE-1#PBF  [QFN40P600X400X80-39N]  15.1,105.25 0 bottom
U22  MAX17260SETD+  [SON40P300X300X80-15N]  12.3,111.65 180 bottom
U23  DRV2605LTDGSRQ1  [SOP50P490X110-10N]  36.15,102.3 180 top
U24  BMX160  [PQFN50P250X300X100-14N]  45.1,102.25 0 top
U$1  51441-1093  [FH12-10S-0.5SH]  39.1,41.95 0 top
U$2  51441-1093  [FH12-10S-0.5SH]  115.3,87.15 90 top
U$3  51441-1093  [FH12-10S-0.5SH]  39.15,83 0 top
U$5  51441-1093  [FH12-10S-0.5SH]  39.05,0.9 0 top
UBLOX_GPS  CAM-M8C-0  [LCC100P960X1400X210-31N]  68,20.15 270 top
UBLOX_GPS1  CAM-M8C-0  [LCC100P960X1400X210-31N]  68.05,61.2 270 top
UBLOX_GPS2  CAM-M8C-0  [LCC100P960X1400X210-31N]  96.05,116.1 0 top
UBLOX_GPS3  CAM-M8C-0  [LCC100P960X1400X210-31N]  68.1,102.25 270 top
VREG_MODE  VREG MODE  [SJ_2]  22.05,21.9 90 bottom
VREG_MODE1  VREG MODE  [SJ_2]  22.1,62.95 90 bottom
VREG_MODE2  VREG MODE  [SJ_2]  94.3,70.15 0 bottom
VREG_MODE3  VREG MODE  [SJ_2]  22.15,104 90 bottom

## Library data of the parts
ANT ANT1-ANT3 = PRO-OB-440; DESCRIPTION: OnBoard SMD 2400 antenna; HEIGHT: mm; MANUFACTURER_NAME: Proant AB; MANUFACTURER_PART_NUMBER: PRO-OB-440
BATTERY1-BATTERY4 = SparkFun-Connectors; PROD_ID: CONN-11443; SF_ID: PRT-08612; SPICEPREFIX: E
BME1-BME3 BME280 = BME280; AVAILABILITY: Unavailable; DESCRIPTION: Integrated pressure, humidity and temperature sensor; 8-pin 2.5x2.5x0.93mm LGA; MF: Bosch; MP: BME280; PACKAGE: LGA-8 Bosch; PRICE: None
C1 C2 C8 C22 C38 C39 C71 C72 C75 C76 C108 C109 C112 C113 C145 C146 = SparkFun-Capacitors; PROD_ID: CAP-07880
C3 C4 C14 C15 C40 C41 C45 C46 C77 C78 C82 C83 C114 C115 C119 C120 = SparkFun-Capacitors; PROD_ID: CAP-00810
C5 C6 C42 C43 C79 C80 C116 C117 = SparkFun-Capacitors; PROD_ID: CAP-08913
C7 C44 C81 C118 = SparkFun-Capacitors; PROD_ID: CAP-07888
C9-C13 C16 C18 C20 C24-C35 C48-C66 C73 C85-C103 C110 C122-C140 C147 R7-R9 R16 R20-R29 R60-R72 R76 R98-R110 R114 R136-R148 R152 = MF_Passives; POPULATE: 1
C17 C69 C106 C143 = SparkFun-Capacitors; PROD_ID: CAP-08604
C19 C36 C37 C67 C68 C70 C104 C105 C107 C141 C142 C144 = SparkFun-Capacitors; PROD_ID: CAP-08280
C21 C23 C47 C74 C84 C111 C121 C148 = SparkFun-Capacitors; PROD_ID: CAP-11015
D1 D3 D6 D8 = MF_LEDs; HOUSEPART: YES; MPN: MF-LED-0603-RED; POPULATE: 1; URL: https://factory.macrofab.com/part/MF-LED-0603-RED
D2 D4 D5 D7 = MF_LEDs; HOUSEPART: YES; MPN: MF-LED-3228-RGB; POPULATE: 1; URL: https://factory.macrofab.com/part/MF-LED-3228-RGB
ESP32-PICO-D1-ESP32-PICO-D4 = ESP32-PICO-D4; AVAILABILITY: Unavailable; DESCRIPTION: WIFi/Bluetooth SIP; MF: Espressif Systems; MP: ESP32-PICO-D4; PACKAGE: SMD-48 Espressif Systems; PRICE: None
FLASH FLASH1-FLASH3 RESET RESET1-RESET3 = MF_Switches; HOUSEPART: YES; MPN: MF-SW-TACT-4.2MM; POPULATE: 1; URL: https://factory.macrofab.com/part/MF-SW-TACT-4.2MM
FT1-FT3 FT231 = FT231XS-U; SPICEPREFIX: F
J1 J10 J18 J26 = MF_Connectors; HOUSEPART: YES; MPN: MF-CON-MICROUSB-RIGHT; POPULATE: 1; URL: https://factory.macrofab.com/part/MF-CON-MICROUSB-RIGHT
J2-J4 J6-J9 J11 J12 J14-J17 J19 J20 J22-J25 J27 J28 J30-J32 = SparkFun-Connectors; DNP: 1
J5 J13 J21 J29 TP1-TP8 = SparkFun-Connectors
L1 L7 L13 L19 = SparkFun-Coils; MPN: 744761016C; PROD_ID: NDUC-13805
L2 L8 L14 L20 = LPS4018-472MRB; AVAILABILITY: Unavailable; DESCRIPTION: Power inductor, shielded, 20/30% tol, SMT, RoHS, lead-free, halogen-free; MF: Coilcraft; MP: LPS4018-472MRB; MPN: LPS4018-472MRB; PACKAGE: None; PRICE: None
L3 L5 L9 L11 L15 L17 L21 L23 = MF_Passives; MPN: L1210R2R2MDWIT
L4 L6 L10 L12 L16 L18 L22 L24 = MF_Passives; MPN: L1210R4R7MDWIT
R1 R2 R5 R6 R12-R14 R30-R33 R36 R39 R43 R44 R47-R49 R53 R73-R75 R77 R78 R81 R82 R85-R87 R91 R111-R113 R115 R116 R119 R120 R123-R125 R129 R149-R151 = SparkFun-Resistors; PROD_ID: RES-00824
R3 R4 R34 R35 R79 R80 R117 R118 = SparkFun-Resistors; PROD_ID: RES-09334
R10 R11 R15 R17 R37 R38 R40-R42 R45 R46 R50-R52 R54-R57 R83 R84 R88-R90 R92-R95 R121 R122 R126-R128 R130-R133 = SparkFun-Resistors; PROD_ID: RES-07856
R18 R19 R58 R59 R96 R97 R134 R135 = SparkFun-Resistors; DNP: 1; PROD_ID: RES-07856
S1-S16 = EVQ-P4HB3B; AVAILABILITY: Unavailable; DESCRIPTION: Tactile Switch SPST-NO Side Actuated Edge Mount, Right Angle; MF: Panasonic Electronic; MP: EVQ-P4HB3B; PACKAGE: None; PRICE: None
SD1-SD4 = MF_Connectors; HOUSEPART: YES; MPN: MF-MICROSD; POPULATE: 1; URL: https://factory.macrofab.com/part/MF-MICROSD
U1 U9 U15 U21 = LTC3586EUFE-3_TRPBF; AVAILABILITY: Unavailable; DESCRIPTION: USB Power Manager 4.35V to 5.5V 38-Pin QFN EP T/R; MF: Analog Devices; MP: LTC3586EUFE; PACKAGE: QFN -38 Analog Devices; PRICE: None
U2 U10 U16 U22 = MAX17260SETD_coulomb; AVAILABILITY: Unavailable; DESCRIPTION: Fuel Gauge Li+/LiFePO4 1-Cell 2-Wire Interface 5.1uA 0.4V 14-Pin TDFN-EP Tube; MF: Maxim Integrated; MP: MAX17260SETD+; PACKAGE: TDFN-14 Maxim; PRICE: None
U3 U4 U7 U8 U13 U14 U19 U20 = MF_Discrete_Semiconductor; HOUSEPART: YES; MPN: MF-DSC-SOT233-MMBT3904; POPULATE: 1; URL: https://factory.macrofab.com/part/MF-DSC-SOT233-MMBT3904
U5 U11 U17 U23 = DRV2605LTDGSRQ1; AVAILABILITY: Unavailable; DESCRIPTION: Haptic Driver for ERM and LRA With Built-In Library and Smart Loop A 10-VSSOP -40 to 105; MF: Texas Instruments; MP: DRV2605LTDGSRQ1; PACKAGE: TFSOP-10 Texas Instruments; PRICE: None
U6 U12 U18 U24 = BMX160; AVAILABILITY: Unavailable; DESCRIPTION: Accelerometer, Gyroscope, Magnetometer, 9 Axis Sensor I²C, SPI Output; MF: Bosch Sensortec; MP: BMX160; PACKAGE: VFLGA-14 Bosch Sensortec; PRICE: None
U$1-U$3 U$5 = myLib; MPN: 51441-1093
UBLOX_GPS UBLOX_GPS1-UBLOX_GPS3 = CAM-M8C-0; AVAILABILITY: Unavailable; DESCRIPTION: Ic Receiver Gps Chip Ant 31lcc; MF: U-Blox America; MP: CAM-M8C-0; PACKAGE: SMD-31 u-blox; PRICE: None
VREG_MODE VREG_MODE1-VREG_MODE3 = jumper

## Nets
3V3_GPS: C13.P$1 C16.P$2 C17.1 J2.6 L4.P$1 R23.P$1 UBLOX_GPS.1 UBLOX_GPS.9
3V3_GPS1: C52.P$1 C53.P$2 C69.1 J9.6 L10.P$1 R66.P$1 UBLOX_GPS1.1 UBLOX_GPS1.9
3V3_GPS2: C89.P$1 C90.P$2 C106.1 J17.6 L16.P$1 R104.P$1 UBLOX_GPS2.1 UBLOX_GPS2.9
3V3_GPS3: C126.P$1 C127.P$2 C143.1 J25.6 L22.P$1 R142.P$1 UBLOX_GPS3.1 UBLOX_GPS3.9
3V3_SDC: C14.1 C15.1 C18.P$1 C24.P$1 L6.P$2 R12.2 R13.2 R14.2 R25.P$1 R43.2 SD1.PIN4
3V3_SDC1: C45.1 C46.1 C54.P$1 C55.P$1 L12.P$2 R47.2 R48.2 R49.2 R53.2 R68.P$1 SD2.PIN4
3V3_SDC2: C82.1 C83.1 C91.P$1 C92.P$1 L18.P$2 R85.2 R86.2 R87.2 R91.2 R106.P$1 SD3.PIN4
3V3_SDC3: C119.1 C120.1 C128.P$1 C129.P$1 L24.P$2 R123.2 R124.2 R125.2 R129.2 R144.P$1 SD4.PIN4
BAT_ALERT: U2.12
BAT_ALERT1: U10.12
BAT_ALERT2: U16.12
BAT_ALERT3: U22.12
BMX_INT: ESP32-PICO-D4.10 U6.4
BMX_INT1: ESP32-PICO-D1.10 U12.4
BMX_INT2: ESP32-PICO-D2.10 U18.4
BMX_INT3: ESP32-PICO-D3.10 U24.4
D+: C6.1 J1.3 R4.1
D+1: C43.1 J10.3 R35.1
D+2: C80.1 J18.3 R80.1
D+3: C117.1 J26.3 R118.1
D-: C5.1 J1.2 R3.1
D-1: C42.1 J10.2 R34.1
D-2: C79.1 J18.2 R79.1
D-3: C116.1 J26.2 R117.1
EN_GPS: ESP32-PICO-D4.16 R31.2 U1.21
EN_GPS1: ESP32-PICO-D1.16 R74.2 U9.21
EN_GPS2: ESP32-PICO-D2.16 R112.2 U15.21
EN_GPS3: ESP32-PICO-D3.16 R150.2 U21.21
EN_LCD: ESP32-PICO-D4.24 R36.2 U1.33
EN_LCD1: ESP32-PICO-D1.24 R75.2 U9.33
EN_LCD2: ESP32-PICO-D2.24 R113.2 U15.33
EN_LCD3: ESP32-PICO-D3.24 R151.2 U21.33
EN_SDC: ESP32-PICO-D4.22 R30.2 U1.20
EN_SDC1: ESP32-PICO-D1.22 R73.2 U9.20
EN_SDC2: ESP32-PICO-D2.22 R111.2 U15.20
EN_SDC3: ESP32-PICO-D3.22 R149.2 U21.20
ESP_EN: C3.2 ESP32-PICO-D4.9 R1.1 RESET.P$1 RESET.P$2 U4.P$3
ESP_EN1: C40.2 ESP32-PICO-D1.9 R32.1 RESET1.P$1 RESET1.P$2 U8.P$3
ESP_EN2: C77.2 ESP32-PICO-D2.9 R77.1 RESET2.P$1 RESET2.P$2 U14.P$3
ESP_EN3: C114.2 ESP32-PICO-D3.9 R115.1 RESET3.P$1 RESET3.P$2 U20.P$3
ESP_FLASH: ESP32-PICO-D4.23 FLASH.P$1 FLASH.P$2 J4.3 R2.1 U3.P$3
ESP_FLASH1: ESP32-PICO-D1.23 FLASH1.P$1 FLASH1.P$2 J12.3 R33.1 U7.P$3
ESP_FLASH2: ESP32-PICO-D2.23 FLASH2.P$1 FLASH2.P$2 J20.3 R78.1 U13.P$3
ESP_FLASH3: ESP32-PICO-D3.23 FLASH3.P$1 FLASH3.P$2 J28.3 R116.1 U19.P$3
ESP_RX: ESP32-PICO-D4.40 FT231.20 J6.1 R11.1
ESP_RX1: ESP32-PICO-D1.40 FT1.20 J14.1 R46.1
ESP_RX2: ESP32-PICO-D2.40 FT2.20 J22.1 R84.1
ESP_RX3: ESP32-PICO-D3.40 FT3.20 J30.1 R122.1
ESP_TX: ESP32-PICO-D4.41 FT231.4 J7.1 R10.1
ESP_TX1: ESP32-PICO-D1.41 FT1.4 J15.1 R45.1
ESP_TX2: ESP32-PICO-D2.41 FT2.4 J23.1 R83.1
ESP_TX3: ESP32-PICO-D3.41 FT3.4 J31.1 R121.1
GND: ANT.1 BATTERY1.1 BATTERY1.NC1 BATTERY1.NC2 BME280.1 BME280.5 BME280.7 C2.1 C3.1 C4.2 C5.2 C6.2 C7.2 C8.1 C9.P$2 C10.P$1 C12.P$1 C14.2 C15.2 C16.P$1 C17.2 C19.1 C20.P$1 C21.2 C23.2 C24.P$2 C25.P$1 C26.P$1 C27.P$1 C28.P$1 C29.P$1 C30.P$2 C34.P$1 C35.P$1 C36.2 C37.1 C38.1 ESP32-PICO-D4.49 FLASH.P$3 FLASH.P$4 FT231.6 FT231.16 J1.5 J1.S1 J1.S2 J1.S3 J1.S4 J1.S5 J1.S6 J2.3 J3.1 J4.1 J8.1 L1.2 R7.P$1 R8.P$1 R20.P$1 R22.P$2 R24.P$2 R27.P$1 R30.1 R31.1 R36.1 RESET.P$3 RESET.P$4 S1.2 S1.3 S1.4 S2.2 S2.3 S2.4 S3.2 S3.3 S3.4 S4.2 S4.3 S4.4 SD1.G0 SD1.G1 SD1.PIN6 U1.5 U1.39 U2.8 U2.9 U2.15 U5.4 U5.8 U6.1 U6.2 U6.3 U6.6 U6.7 U$5.VSS U$5.VSSA UBLOX_GPS.4 UBLOX_GPS.5 UBLOX_GPS.10 UBLOX_GPS.11 UBLOX_GPS.12 UBLOX_GPS.13 UBLOX_GPS.14 UBLOX_GPS.15 UBLOX_GPS.18 UBLOX_GPS.19 UBLOX_GPS.21 UBLOX_GPS.22 UBLOX_GPS.27 UBLOX_GPS.31 VREG_MODE.1
GND1: ANT1.1 BATTERY2.1 BATTERY2.NC1 BATTERY2.NC2 BME1.1 BME1.5 BME1.7 C39.1 C40.1 C41.2 C42.2 C43.2 C44.2 C45.2 C46.2 C47.2 C48.P$2 C49.P$1 C51.P$1 C53.P$1 C55.P$2 C56.P$1 C57.P$1 C58.P$1 C59.P$1 C60.P$1 C61.P$2 C65.P$1 C66.P$1 C67.2 C68.1 C69.2 C70.1 C71.1 C72.1 C73.P$1 C74.2 ESP32-PICO-D1.49 FLASH1.P$3 FLASH1.P$4 FT1.6 FT1.16 J9.3 J10.5 J10.S1 J10.S2 J10.S3 J10.S4 J10.S5 J10.S6 J11.1 J12.1 J16.1 L7.2 R60.P$1 R61.P$1 R63.P$1 R65.P$2 R67.P$2 R70.P$1 R73.1 R74.1 R75.1 RESET1.P$3 RESET1.P$4 S5.2 S5.3 S5.4 S6.2 S6.3 S6.4 S7.2 S7.3 S7.4 S8.2 S8.3 S8.4 SD2.G0 SD2.G1 SD2.PIN6 U9.5 U9.39 U10.8 U10.9 U10.15 U11.4 U11.8 U12.1 U12.2 U12.3 U12.6 U12.7 U$1.VSS U$1.VSSA UBLOX_GPS1.4 UBLOX_GPS1.5 UBLOX_GPS1.10 UBLOX_GPS1.11 UBLOX_GPS1.12 UBLOX_GPS1.13 UBLOX_GPS1.14 UBLOX_GPS1.15 UBLOX_GPS1.18 UBLOX_GPS1.19 UBLOX_GPS1.21 UBLOX_GPS1.22 UBLOX_GPS1.27 UBLOX_GPS1.31 VREG_MODE1.1
GND2: ANT3.1 BATTERY4.1 BATTERY4.NC1 BATTERY4.NC2 BME3.1 BME3.5 BME3.7 C113.1 C114.1 C115.2 C116.2 C117.2 C118.2 C119.2 C120.2 C121.2 C122.P$2 C123.P$1 C125.P$1 C127.P$1 C129.P$2 C130.P$1 C131.P$1 C132.P$1 C133.P$1 C134.P$1 C135.P$2 C139.P$1 C140.P$1 C141.2 C142.1 C143.2 C144.1 C145.1 C146.1 C147.P$1 C148.2 ESP32-PICO-D3.49 FLASH3.P$3 FLASH3.P$4 FT3.6 FT3.16 J25.3 J26.5 J26.S1 J26.S2 J26.S3 J26.S4 J26.S5 J26.S6 J27.1 J28.1 J32.1 L19.2 R136.P$1 R137.P$1 R139.P$1 R141.P$2 R143.P$2 R146.P$1 R149.1 R150.1 R151.1 RESET3.P$3 RESET3.P$4 S13.2 S13.3 S13.4 S14.2 S14.3 S14.4 S15.2 S15.3 S15.4 S16.2 S16.3 S16.4 SD4.G0 SD4.G1 SD4.PIN6 U21.5 U21.39 U22.8 U22.9 U22.15 U23.4 U23.8 U24.1 U24.2 U24.3 U24.6 U24.7 U$3.VSS U$3.VSSA UBLOX_GPS3.4 UBLOX_GPS3.5 UBLOX_GPS3.10 UBLOX_GPS3.11 UBLOX_GPS3.12 UBLOX_GPS3.13 UBLOX_GPS3.14 UBLOX_GPS3.15 UBLOX_GPS3.18 UBLOX_GPS3.19 UBLOX_GPS3.21 UBLOX_GPS3.22 UBLOX_GPS3.27 UBLOX_GPS3.31 VREG_MODE3.1
GND3: ANT2.1 BATTERY3.1 BATTERY3.NC1 BATTERY3.NC2 BME2.1 BME2.5 BME2.7 C76.1 C77.1 C78.2 C79.2 C80.2 C81.2 C82.2 C83.2 C84.2 C85.P$2 C86.P$1 C88.P$1 C90.P$1 C92.P$2 C93.P$1 C94.P$1 C95.P$1 C96.P$1 C97.P$1 C98.P$2 C102.P$1 C103.P$1 C104.2 C105.1 C106.2 C107.1 C108.1 C109.1 C110.P$1 C111.2 ESP32-PICO-D2.49 FLASH2.P$3 FLASH2.P$4 FT2.6 FT2.16 J17.3 J18.5 J18.S1 J18.S2 J18.S3 J18.S4 J18.S5 J18.S6 J19.1 J20.1 J24.1 L13.2 R98.P$1 R99.P$1 R101.P$1 R103.P$2 R105.P$2 R108.P$1 R111.1 R112.1 R113.1 RESET2.P$3 RESET2.P$4 S9.2 S9.3 S9.4 S10.2 S10.3 S10.4 S11.2 S11.3 S11.4 S12.2 S12.3 S12.4 SD3.G0 SD3.G1 SD3.PIN6 U15.5 U15.39 U16.8 U16.9 U16.15 U17.4 U17.8 U18.1 U18.2 U18.3 U18.6 U18.7 U$2.VSS U$2.VSSA UBLOX_GPS2.4 UBLOX_GPS2.5 UBLOX_GPS2.10 UBLOX_GPS2.11 UBLOX_GPS2.12 UBLOX_GPS2.13 UBLOX_GPS2.14 UBLOX_GPS2.15 UBLOX_GPS2.18 UBLOX_GPS2.19 UBLOX_GPS2.21 UBLOX_GPS2.22 UBLOX_GPS2.27 UBLOX_GPS2.31 VREG_MODE2.1
GPIO_EXT: ESP32-PICO-D4.13 J8.6
GPIO_EXT1: ESP32-PICO-D1.13 J16.6
GPIO_EXT2: ESP32-PICO-D2.13 J24.6
GPIO_EXT3: ESP32-PICO-D3.13 J32.6
GPS_RESET: J2.1 R18.2
GPS_RESET1: J9.1 R58.2
GPS_RESET2: J17.1 R96.2
GPS_RESET3: J25.1 R134.2
GPS_RX: ESP32-PICO-D4.25 J2.5 R17.2
GPS_RX1: ESP32-PICO-D1.25 J9.5 R57.2
GPS_RX2: ESP32-PICO-D2.25 J17.5 R95.2
GPS_RX3: ESP32-PICO-D3.25 J25.5 R133.2
GPS_SAFEBOOT: J2.2 R19.2
GPS_SAFEBOOT1: J9.2 R59.2
GPS_SAFEBOOT2: J17.2 R97.2
GPS_SAFEBOOT3: J25.2 R135.2
GPS_TX: ESP32-PICO-D4.27 J2.4 R15.1
GPS_TX1: ESP32-PICO-D1.27 J9.4 R56.1
GPS_TX2: ESP32-PICO-D2.27 J17.4 R94.1
GPS_TX3: ESP32-PICO-D3.27 J25.4 R132.1
I2C_SCL: BME280.4 ESP32-PICO-D4.42 J3.2 R37.1 U2.14 U5.2 U6.13
I2C_SCL1: BME1.4 ESP32-PICO-D1.42 J11.2 R54.1 U10.14 U11.2 U12.13
I2C_SCL2: BME2.4 ESP32-PICO-D2.42 J19.2 R92.1 U16.14 U17.2 U18.13
I2C_SCL3: BME3.4 ESP32-PICO-D3.42 J27.2 R130.1 U22.14 U23.2 U24.13
I2C_SDA: BME280.3 ESP32-PICO-D4.39 J3.3 R38.1 U2.13 U5.3 U6.14
I2C_SDA1: BME1.3 ESP32-PICO-D1.39 J11.3 R55.1 U10.13 U11.3 U12.14
I2C_SDA2: BME2.3 ESP32-PICO-D2.39 J19.3 R93.1 U16.13 U17.3 U18.14
I2C_SDA3: BME3.3 ESP32-PICO-D3.39 J27.3 R131.1 U22.13 U23.3 U24.14
JUMPER: U1.9 VREG_MODE.2
JUMPER1: U9.9 VREG_MODE1.2
JUMPER2: U15.9 VREG_MODE2.2
JUMPER3: U21.9 VREG_MODE3.2
LCD_CLK: ESP32-PICO-D4.17 J8.5 U$5.SCLK
LCD_CLK1: ESP32-PICO-D1.17 J16.5 U$1.SCLK
LCD_CLK2: ESP32-PICO-D2.17 J24.5 U$2.SCLK
LCD_CLK3: ESP32-PICO-D3.17 J32.5 U$3.SCLK
LCD_CS: ESP32-PICO-D4.21 J8.3 U$5.SCS
LCD_CS1: ESP32-PICO-D1.21 J16.3 U$1.SCS
LCD_CS2: ESP32-PICO-D2.21 J24.3 U$2.SCS
LCD_CS3: ESP32-PICO-D3.21 J32.3 U$3.SCS
LCD_EXTCOMM: ESP32-PICO-D4.12 U$5.EXTCOMIN
LCD_EXTCOMM1: ESP32-PICO-D1.12 U$1.EXTCOMIN
LCD_EXTCOMM2: ESP32-PICO-D2.12 U$2.EXTCOMIN
LCD_EXTCOMM3: ESP32-PICO-D3.12 U$3.EXTCOMIN
LCD_MOSI: ESP32-PICO-D4.20 J8.4 U$5.SI
LCD_MOSI1: ESP32-PICO-D1.20 J16.4 U$1.SI
LCD_MOSI2: ESP32-PICO-D2.20 J24.4 U$2.SI
LCD_MOSI3: ESP32-PICO-D3.20 J32.4 U$3.SI
LED1: ESP32-PICO-D4.18 R40.1
LED2: ESP32-PICO-D4.15 R41.1
LED3: ESP32-PICO-D4.14 R42.1
LED4: ESP32-PICO-D1.18 R50.1
LED5: ESP32-PICO-D1.15 R51.1
LED6: ESP32-PICO-D1.14 R52.1
LED7: ESP32-PICO-D2.18 R88.1
LED8: ESP32-PICO-D2.15 R89.1
LED9: ESP32-PICO-D2.14 R90.1
LED10: ESP32-PICO-D3.18 R126.1
LED11: ESP32-PICO-D3.15 R127.1
LED12: ESP32-PICO-D3.14 R128.1
N$1: C1.1 ESP32-PICO-D4.2 L1.1
N$2: ANT.2 C1.2 C2.2
N$3: R5.2 U3.P$1
N$4: R6.2 U4.P$1
N$5: C4.1 FT231.3 FT231.13 FT231.14
N$6: FT231.12 R3.2
N$7: FT231.11 R4.2
N$8: FT231.2 R5.1 U4.P$2
N$9: FT231.1 R6.1 U3.P$2
N$10: R7.P$2 U1.29
N$11: C10.P$2 R8.P$2 U1.4
N$12: C11.P$1 R9.P$1 R20.P$2 U1.10
N$13: L3.P$2 U1.13
N$14: C31.P$1 C32.P$1 C33.P$1 R26.P$1 R27.P$2 U1.11
N$15: L2.2 U1.37
N$16: D1.CATHODE U1.30
N$17: D1.ANODE R21.P$1
N$18: L3.P$1 U1.19
N$19: TP2.P$1 U1.18
N$20: L4.P$2 U1.26
N$21: C13.P$2 R22.P$1 R23.P$2 U1.28
N$22: L5.P$1 U1.8
N$23: C22.1 ESP32-PICO-D1.2 L7.1
N$24: C20.P$2 R16.P$2 TP1.P$1 U1.38
N$25: ANT1.2 C22.2 C39.2
N$26: C18.P$2 R24.P$1 R25.P$2 U1.23
N$27: L6.P$1 U1.25
N$28: D4.P$2 R40.2
N$29: R15.2 UBLOX_GPS.25
N$30: R17.1 UBLOX_GPS.26
N$31: C31.P$2 R28.P$1
N$32: D4.P$3 R42.2
N$33: D4.P$4 R41.2
N$34: UBLOX_GPS.16 UBLOX_GPS.17
N$35: C41.1 FT1.3 FT1.13 FT1.14
N$36: FT1.12 R34.2
N$37: R18.1 UBLOX_GPS.23
N$38: R19.1 UBLOX_GPS.24
N$39: FT1.11 R35.2
N$40: R39.2 U7.P$1
N$41: C36.1 U5.1
N$42: R44.2 U8.P$1
N$43: C33.P$2 R29.P$2 U1.12
N$44: C32.P$2 R29.P$1
N$45: FT1.2 R39.1 U8.P$2
N$46: FT1.1 R44.1 U7.P$2
N$47: C34.P$2 U2.11
N$48: D2.P$2 R50.2
N$49: D2.P$4 R51.2
N$50: J5.P$2 U5.9
N$51: J5.P$1 U5.7
N$52: D2.P$3 R52.2
N$53: R56.2 UBLOX_GPS1.25
N$54: R57.1 UBLOX_GPS1.26
N$55: UBLOX_GPS1.16 UBLOX_GPS1.17
N$56: R58.1 UBLOX_GPS1.23
N$57: R59.1 UBLOX_GPS1.24
N$58: R60.P$2 U9.29
N$59: C49.P$2 R61.P$2 U9.4
N$60: L8.2 U9.37
N$61: D3.CATHODE U9.30
N$62: D3.ANODE R64.P$1
N$63: L9.P$2 U9.13
N$64: L9.P$1 U9.19
N$65: L10.P$2 U9.26
N$66: C52.P$2 R65.P$1 R66.P$2 U9.28
N$67: C54.P$2 R67.P$1 R68.P$2 U9.23
N$68: L12.P$1 U9.25
N$69: L11.P$1 U9.8
N$70: C50.P$1 R62.P$1 R63.P$2 U9.10
N$71: C62.P$1 C63.P$1 C64.P$1 R69.P$1 R70.P$2 U9.11
N$72: C62.P$2 R71.P$1
N$73: C64.P$2 R72.P$2 U9.12
N$74: C63.P$2 R72.P$1
N$75: C65.P$2 U10.11
N$76: C67.1 U11.1
N$77: J13.P$2 U11.9
N$78: J13.P$1 U11.7
N$79: C73.P$2 R76.P$2 TP3.P$1 U9.38
N$80: TP4.P$1 U9.18
N$81: C75.1 ESP32-PICO-D2.2 L13.1
N$82: ANT2.2 C75.2 C76.2
N$83: C78.1 FT2.3 FT2.13 FT2.14
N$84: FT2.12 R79.2
N$85: FT2.11 R80.2
N$86: R81.2 U13.P$1
N$87: R82.2 U14.P$1
N$88: FT2.2 R81.1 U14.P$2
N$89: FT2.1 R82.1 U13.P$2
N$90: D5.P$2 R88.2
N$91: D5.P$4 R89.2
N$92: D5.P$3 R90.2
N$93: R94.2 UBLOX_GPS2.25
N$94: R95.1 UBLOX_GPS2.26
N$95: UBLOX_GPS2.16 UBLOX_GPS2.17
N$96: R96.1 UBLOX_GPS2.23
N$97: R97.1 UBLOX_GPS2.24
N$98: R98.P$2 U15.29
N$99: C86.P$2 R99.P$2 U15.4
N$100: L14.2 U15.37
N$101: D6.CATHODE U15.30
N$102: D6.ANODE R102.P$1
N$103: L15.P$2 U15.13
N$104: L15.P$1 U15.19
N$105: L16.P$2 U15.26
N$106: C89.P$2 R103.P$1 R104.P$2 U15.28
N$107: C91.P$2 R105.P$1 R106.P$2 U15.23
N$108: L18.P$1 U15.25
N$109: L17.P$1 U15.8
N$110: C87.P$1 R100.P$1 R101.P$2 U15.10
N$111: C99.P$1 C100.P$1 C101.P$1 R107.P$1 R108.P$2 U15.11
N$112: C99.P$2 R109.P$1
N$113: C101.P$2 R110.P$2 U15.12
N$114: C100.P$2 R110.P$1
N$115: C102.P$2 U16.11
N$116: C104.1 U17.1
N$117: J21.P$2 U17.9
N$118: J21.P$1 U17.7
N$119: C110.P$2 R114.P$2 TP5.P$1 U15.38
N$120: TP6.P$1 U15.18
N$121: C112.1 ESP32-PICO-D3.2 L19.1
N$122: ANT3.2 C112.2 C113.2
N$123: C115.1 FT3.3 FT3.13 FT3.14
N$124: FT3.12 R117.2
N$125: FT3.11 R118.2
N$126: R119.2 U19.P$1
N$127: R120.2 U20.P$1
N$128: FT3.2 R119.1 U20.P$2
N$129: FT3.1 R120.1 U19.P$2
N$130: D7.P$2 R126.2
N$131: D7.P$4 R127.2
N$132: D7.P$3 R128.2
N$133: R132.2 UBLOX_GPS3.25
N$134: R133.1 UBLOX_GPS3.26
N$135: UBLOX_GPS3.16 UBLOX_GPS3.17
N$136: R134.1 UBLOX_GPS3.23
N$137: R135.1 UBLOX_GPS3.24
N$138: R136.P$2 U21.29
N$139: C123.P$2 R137.P$2 U21.4
N$140: L20.2 U21.37
N$141: D8.CATHODE U21.30
N$142: D8.ANODE R140.P$1
N$143: L21.P$2 U21.13
N$144: L21.P$1 U21.19
N$145: L22.P$2 U21.26
N$146: C126.P$2 R141.P$1 R142.P$2 U21.28
N$147: C128.P$2 R143.P$1 R144.P$2 U21.23
N$148: L24.P$1 U21.25
N$149: L23.P$1 U21.8
N$150: C124.P$1 R138.P$1 R139.P$2 U21.10
N$151: C136.P$1 C137.P$1 C138.P$1 R145.P$1 R146.P$2 U21.11
N$152: C136.P$2 R147.P$1
N$153: C138.P$2 R148.P$2 U21.12
N$154: C137.P$2 R148.P$1
N$155: C139.P$2 U22.11
N$156: C141.1 U23.1
N$157: J29.P$2 U23.9
N$158: J29.P$1 U23.7
N$159: C147.P$2 R152.P$2 TP7.P$1 U21.38
N$160: TP8.P$1 U21.18
NC0: ESP32-PICO-D4.32
NC1: ESP32-PICO-D4.33
NC2: ESP32-PICO-D4.28
NC3: ESP32-PICO-D4.29
NC4: ESP32-PICO-D4.30
NC5: ESP32-PICO-D4.31
NC6: ESP32-PICO-D1.28
NC7: ESP32-PICO-D1.29
NC8: ESP32-PICO-D1.32
NC9: ESP32-PICO-D1.33
NC10: ESP32-PICO-D1.30
NC11: ESP32-PICO-D1.31
NC12: ESP32-PICO-D2.28
NC13: ESP32-PICO-D2.29
NC14: ESP32-PICO-D2.32
NC15: ESP32-PICO-D2.33
NC16: ESP32-PICO-D2.30
NC17: ESP32-PICO-D2.31
NC18: ESP32-PICO-D3.28
NC19: ESP32-PICO-D3.29
NC20: ESP32-PICO-D3.32
NC21: ESP32-PICO-D3.33
NC22: ESP32-PICO-D3.30
NC23: ESP32-PICO-D3.31
SD_CLK: ESP32-PICO-D4.35 R14.1 SD1.PIN5
SD_CLK1: ESP32-PICO-D1.35 R49.1 SD2.PIN5
SD_CLK2: ESP32-PICO-D2.35 R87.1 SD3.PIN5
SD_CLK3: ESP32-PICO-D3.35 R125.1 SD4.PIN5
SD_CS: ESP32-PICO-D4.34 R12.1 SD1.PIN2
SD_CS1: ESP32-PICO-D1.34 R47.1 SD2.PIN2
SD_CS2: ESP32-PICO-D2.34 R85.1 SD3.PIN2
SD_CS3: ESP32-PICO-D3.34 R123.1 SD4.PIN2
SD_MISO: ESP32-PICO-D4.38 R43.1 SD1.PIN7
SD_MISO1: ESP32-PICO-D1.38 R53.1 SD2.PIN7
SD_MISO2: ESP32-PICO-D2.38 R91.1 SD3.PIN7
SD_MISO3: ESP32-PICO-D3.38 R129.1 SD4.PIN7
SD_MOSI: ESP32-PICO-D4.36 R13.1 SD1.PIN3
SD_MOSI1: ESP32-PICO-D1.36 R48.1 SD2.PIN3
SD_MOSI2: ESP32-PICO-D2.36 R86.1 SD3.PIN3
SD_MOSI3: ESP32-PICO-D3.36 R124.1 SD4.PIN3
SW1: ESP32-PICO-D4.5 S1.1
SW2: ESP32-PICO-D4.6 S4.1
SW3: ESP32-PICO-D4.7 S3.1
SW4: ESP32-PICO-D4.8 S2.1
SW5: ESP32-PICO-D1.5 S8.1
SW6: ESP32-PICO-D1.6 S7.1
SW7: ESP32-PICO-D1.7 S6.1
SW8: ESP32-PICO-D1.8 S5.1
SW9: ESP32-PICO-D2.5 S12.1
SW10: ESP32-PICO-D2.6 S11.1
SW11: ESP32-PICO-D2.7 S10.1
SW12: ESP32-PICO-D2.8 S9.1
SW13: ESP32-PICO-D3.5 S16.1
SW14: ESP32-PICO-D3.6 S15.1
SW15: ESP32-PICO-D3.7 S14.1
SW16: ESP32-PICO-D3.8 S13.1
V_BAT: BATTERY1.2 C35.P$2 C37.2 U1.32 U2.1 U2.6 U2.7 U2.10 U5.5 U5.6 U5.10 UBLOX_GPS.8
V_BAT1: BATTERY2.2 C66.P$2 C68.2 U9.32 U10.1 U10.6 U10.7 U10.10 U11.5 U11.6 U11.10 UBLOX_GPS1.8
V_BAT2: BATTERY3.2 C103.P$2 C105.2 U15.32 U16.1 U16.6 U16.7 U16.10 U17.5 U17.6 U17.10 UBLOX_GPS2.8
V_BAT3: BATTERY4.2 C140.P$2 C142.2 U21.32 U22.1 U22.6 U22.7 U22.10 U23.5 U23.6 U23.10 UBLOX_GPS3.8
V_LCD: C11.P$2 C19.2 C29.P$2 J8.2 R9.P$2 U1.6 U1.7 U$5.DISP U$5.EXTMODE U$5.VDD U$5.VDDA
V_LCD1: C50.P$2 C60.P$2 C70.2 J16.2 R62.P$2 U9.6 U9.7 U$1.DISP U$1.EXTMODE U$1.VDD U$1.VDDA
V_LCD2: C87.P$2 C97.P$2 C107.2 J24.2 R100.P$2 U15.6 U15.7 U$2.DISP U$2.EXTMODE U$2.VDD U$2.VDDA
V_LCD3: C124.P$2 C134.P$2 C144.2 J32.2 R138.P$2 U21.6 U21.7 U$3.DISP U$3.EXTMODE U$3.VDD U$3.VDDA
V_REG: C12.P$2 C25.P$2 C26.P$2 C27.P$2 C28.P$2 L2.1 L5.P$2 R16.P$1 R21.P$2 U1.1 U1.2 U1.3 U1.14 U1.15 U1.22 U1.24 U1.27 U1.34 VREG_MODE.3
V_REG1: C51.P$2 C56.P$2 C57.P$2 C58.P$2 C59.P$2 L8.1 L11.P$2 R64.P$2 R76.P$1 U9.1 U9.2 U9.3 U9.14 U9.15 U9.22 U9.24 U9.27 U9.34 VREG_MODE1.3
V_REG2: C88.P$2 C93.P$2 C94.P$2 C95.P$2 C96.P$2 L14.1 L17.P$2 R102.P$2 R114.P$1 U15.1 U15.2 U15.3 U15.14 U15.15 U15.22 U15.24 U15.27 U15.34 VREG_MODE2.3
V_REG3: C125.P$2 C130.P$2 C131.P$2 C132.P$2 C133.P$2 L20.1 L23.P$2 R140.P$2 R152.P$1 U21.1 U21.2 U21.3 U21.14 U21.15 U21.22 U21.24 U21.27 U21.34 VREG_MODE3.3
V_USB: C7.1 C9.P$1 FT231.15 J1.1 U1.35 U1.36
V_USB1: C44.1 C48.P$1 FT1.15 J10.1 U9.35 U9.36
V_USB2: C81.1 C85.P$1 FT2.15 J18.1 U15.35 U15.36
V_USB3: C118.1 C122.P$1 FT3.15 J26.1 U21.35 U21.36
VCC: BME280.2 BME280.6 BME280.8 C8.2 C21.1 C23.1 C30.P$1 C38.2 D4.P$1 ESP32-PICO-D4.1 ESP32-PICO-D4.3 ESP32-PICO-D4.4 ESP32-PICO-D4.19 ESP32-PICO-D4.26 ESP32-PICO-D4.37 ESP32-PICO-D4.43 ESP32-PICO-D4.46 J4.2 R1.2 R2.2 R10.2 R11.2 R26.P$2 R28.P$2 R37.2 R38.2 U1.16 U1.17 U6.5 U6.8 U6.12
VCC1: BME1.2 BME1.6 BME1.8 C47.1 C61.P$1 C71.2 C72.2 C74.1 D2.P$1 ESP32-PICO-D1.1 ESP32-PICO-D1.3 ESP32-PICO-D1.4 ESP32-PICO-D1.19 ESP32-PICO-D1.26 ESP32-PICO-D1.37 ESP32-PICO-D1.43 ESP32-PICO-D1.46 J12.2 R32.2 R33.2 R45.2 R46.2 R54.2 R55.2 R69.P$2 R71.P$2 U9.16 U9.17 U12.5 U12.8 U12.12
VCC2: BME2.2 BME2.6 BME2.8 C84.1 C98.P$1 C108.2 C109.2 C111.1 D5.P$1 ESP32-PICO-D2.1 ESP32-PICO-D2.3 ESP32-PICO-D2.4 ESP32-PICO-D2.19 ESP32-PICO-D2.26 ESP32-PICO-D2.37 ESP32-PICO-D2.43 ESP32-PICO-D2.46 J20.2 R77.2 R78.2 R83.2 R84.2 R92.2 R93.2 R107.P$2 R109.P$2 U15.16 U15.17 U18.5 U18.8 U18.12
VCC3: BME3.2 BME3.6 BME3.8 C121.1 C135.P$1 C145.2 C146.2 C148.1 D7.P$1 ESP32-PICO-D3.1 ESP32-PICO-D3.3 ESP32-PICO-D3.4 ESP32-PICO-D3.19 ESP32-PICO-D3.26 ESP32-PICO-D3.37 ESP32-PICO-D3.43 ESP32-PICO-D3.46 J28.2 R115.2 R116.2 R121.2 R122.2 R130.2 R131.2 R145.P$2 R147.P$2 U21.16 U21.17 U24.5 U24.8 U24.12

## Tracks (layer width: path | path; a pad name or v marks a point on that pad's centre or on a via)
3V3_GPS  (via drill 0.35)
  Top 0.2: 70.3,13.85 C17.1
  Top 0.305: 69.8,14.35 70.3,13.85
  Top 0.406: L4.P$1 10,26.85 | 10,26.85 10.7,26.85 v11,27.15 | 10,26.85 9.61,27.24 9.61,29.4 9.4,29.61 9.4,30.56 10.54,31.7 v10.9,31.7 | J2.6 58.4,38.55 55,35.15 v53,35.15 | v24.95,35.6 25.35,36 32.7,36 v33.3,35.4 | UBLOX_GPS.9 69.8,14.35 69.8,6.95 67,4.15 49.1,4.15 v48.25,5 | 61.8,14.75 v48.2,14.75
  Top 0.508: UBLOX_GPS.1 61.8,14.75
  Top 0.61: R23.P$1 11,25.5 v11,26.15
  Bottom 0.305: 48.15,14.7 v48.2,14.75 48.15,14.8 | 52.95,35.1 49.05,35.1
  Bottom 0.406: v11,27.15 C16.P$2 | v10.9,31.7 11.2,31.7 12.55,33.05 12.55,35.15 24.5,35.15 v24.95,35.6 | v53,35.15 52.95,35.1 33.6,35.1 v33.3,35.4 | 48.15,14.7 48.15,5.1 v48.25,5 | 48.15,14.8 48.15,34.2 49.05,35.1
  Bottom 0.61: C16.P$2 v11,26.15 11,25.5 R23.P$1
3V3_GPS1  (via drill 0.35)
  Top 0.2: 70.35,54.9 C69.1
  Top 0.305: 69.85,55.4 70.35,54.9
  Top 0.406: L10.P$1 10.05,67.9 | 10.05,67.9 10.75,67.9 v11.05,68.2 | 10.05,67.9 9.66,68.29 9.66,70.45 9.45,70.66 9.45,71.61 10.59,72.75 v10.95,72.75 | J9.6 58.45,79.6 55.05,76.2 v53.05,76.2 | v25,76.65 25.4,77.05 32.75,77.05 v33.35,76.45 | UBLOX_GPS1.9 69.85,55.4 69.85,48 67.05,45.2 49.15,45.2 v48.3,46.05 | 61.85,55.8 v48.25,55.8
  Top 0.508: UBLOX_GPS1.1 61.85,55.8
  Top 0.61: R66.P$1 11.05,66.55 v11.05,67.2